# Altium PCB MD_Automated_Tester_V1.0.PcbDoc
Units mil, origin at the board's own origin, x right, y up, seen from the top; angles counter-clockwise.
Board outline 6000 x 4000 mil, 2 copper layers (Top Layer, Bottom Layer); 13 components, 14 nets, 68 pads, 0 vias.
Unrouted connection lines stored in the file: 12.
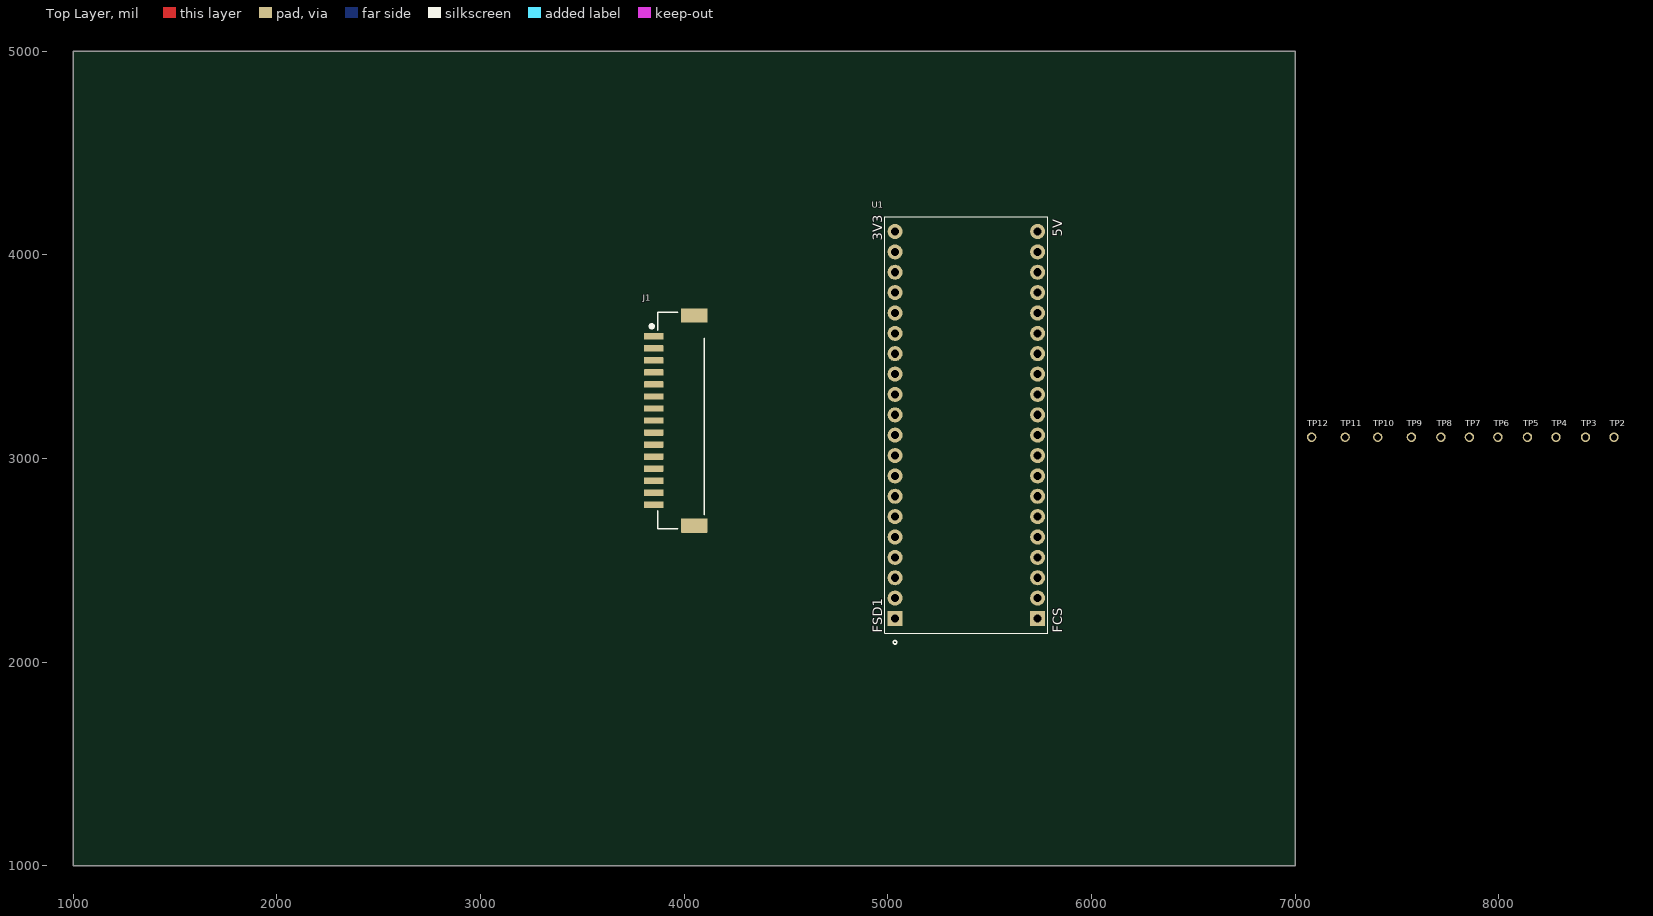
[diagram p0: Top Layer view]
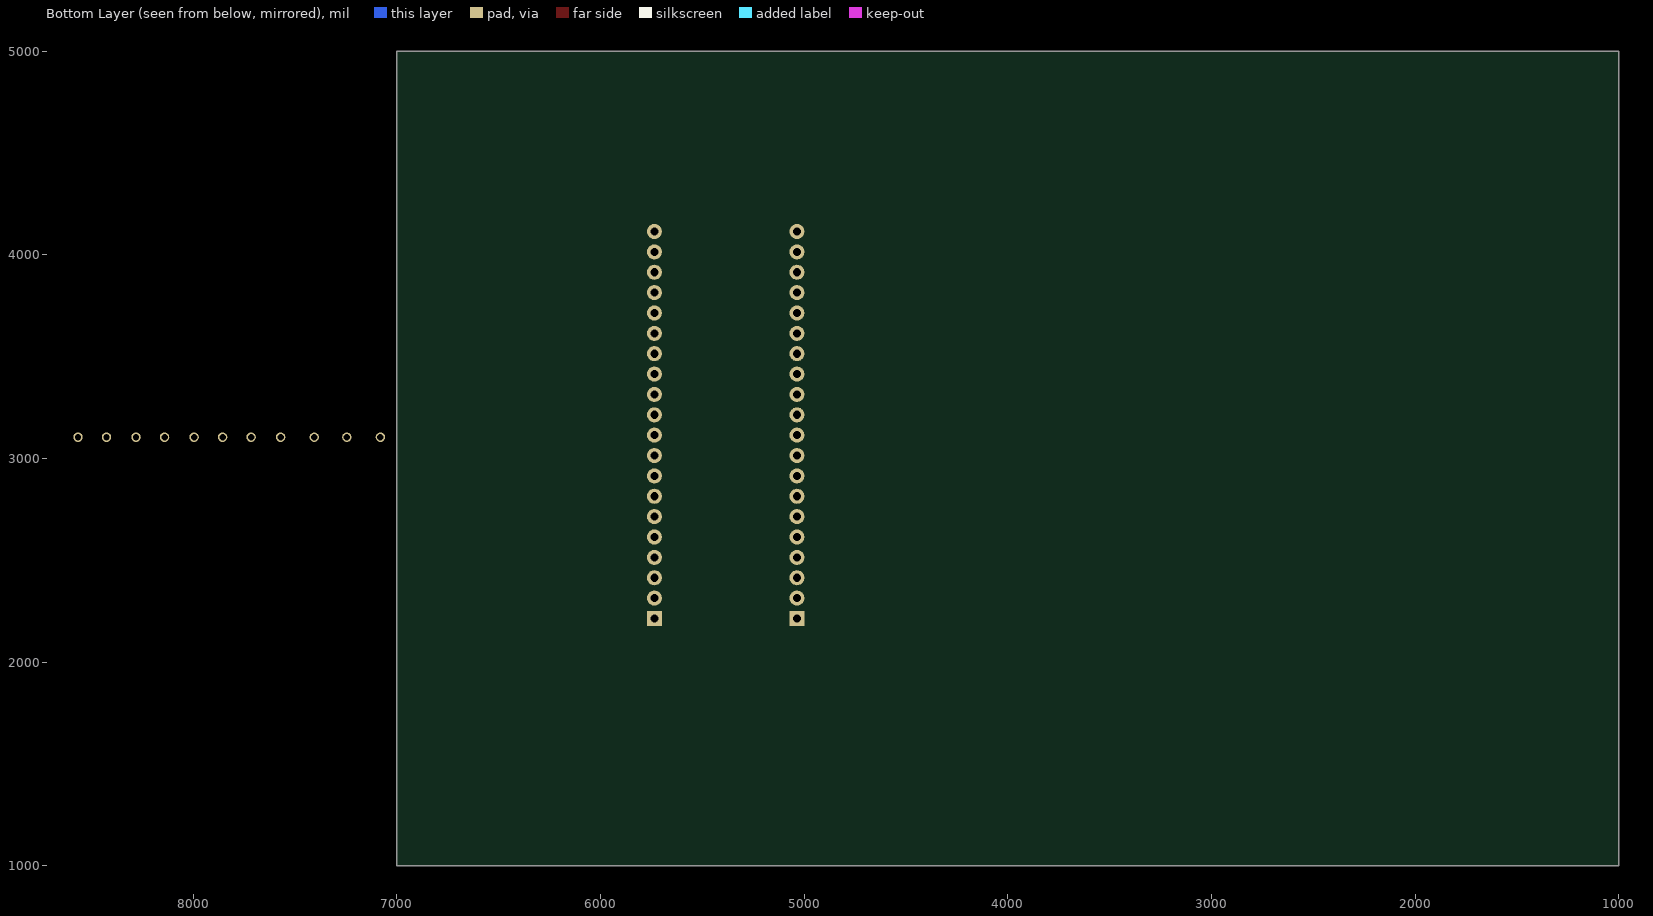
[diagram p1: Bottom Layer view, seen from below]

## Layer stack, top to bottom
Top Solder: solder mask 0.4, Solder Resist, Dk 3.5
Top Layer: signal copper 1.4
Dielectric 1: dielectric 12.6, FR-4, Dk 4.8
Bottom Layer: signal copper 1.4
Bottom Solder: solder mask 0.4, Solder Resist, Dk 3.5

## Board outline
1000,1000 7000,1000 7000,5000 1000,5000

## Design rules (kind name [scope] priority, off if disabled: settings)
Clearance [All] p1: gap=10 ignorepadtopadclearanceinfootprint=FALSE except(0: Arc-Hole Track-Hole SMDPad-Hole THPad-Hole Via-Hole Fill-Hole Poly-Hole Region-Hole Text-Hole)
PolygonConnect [All] p1: connectstyle=Relief reliefconductorwidth=10 reliefentries=4 polygonreliefangle="90 Angle" airgapwidth=10
RoomDefinition tester_sch [InComponentClass('tester_sch')] p1: confinementstyle=ConfineIn formatcopy=TRUE lockcomponents=FALSE outline 7045,1005 10025,1005 10025,3200 7045,3200
RoutingVias [All] p1: holewidth=28 width=50 viastyle="Through Hole" minholewidth=28 minwidth=50 maxholewidth=28 maxwidth=50
SolderMaskExpansion [All] p1: expansion=4 istentingtop=FALSE
Width [All] p1: maxlimit=10 minlimit=10 preferedwidth=10
30 further rules are at their usual default settings.

## Components (designator, comment, footprint, x,y, rotation, side; value= is the part's Value field where it differs from the comment)
J1 "BM15B-ZESS-TBT(LF)(SN)" "JST ZE SMT 15POS" 3958.27,3157.36 r90 top
TP2 "Test Point (Via)" TP 8565,3105 r0 top
TP3 "Test Point (Via)" TP 8425,3105 r0 top
TP4 "Test Point (Via)" TP 8280,3105 r0 top
TP5 "Test Point (Via)" TP 8140,3105 r0 top
TP6 "Test Point (Via)" TP 7995,3105 r0 top
TP7 "Test Point (Via)" TP 7855,3105 r0 top
TP8 "Test Point (Via)" TP 7715,3105 r0 top
TP9 "Test Point (Via)" TP 7570,3105 r0 top
TP10 "Test Point (Via)" TP 7405,3105 r90 top
TP11 "Test Point (Via)" TP 7245,3105 r0 top
TP12 "Test Point (Via)" TP 7080,3105 r90 top
U1 "ESP32-PICO-D4-KIT" ESP32-PICO-D4-KIT 5035,2215 r90 top

## Footprints (in the part's own frame and the unit in brackets; to place one, negate y for a bottom-side part, rotate by r counter-clockwise, add the part's x,y. Pads: shape width x height; smd on the part's side, far side on the other; paste and mask are expansions set on the pad)
ESP32-PICO-D4-KIT [mil]
  rect 74x74 hole 40: J2_1(0,0) J3_1(0,-700)
  round 74 hole 40: J2_2(100,0) J2_3(200,0) J2_4(300,0) J2_5(400,0) J2_6(500,0) J2_7(600,0) J2_8(700,0) J2_9(800,0) J2_10(900,0) J2_11(1000,0) J2_12(1100,0) J2_13(1200,0) J2_14(1300,0) J2_15(1400,0) J2_16(1500,0) J2_17(1600,0) J2_18(1700,0) J2_19(1800,0) J2_20(1900,0) J3_2(100,-700) J3_3(200,-700) J3_4(300,-700) J3_5(400,-700) J3_6(500,-700) J3_7(600,-700) J3_8(700,-700) J3_9(800,-700) J3_10(900,-700) J3_11(1000,-700) J3_12(1100,-700) J3_13(1200,-700) J3_14(1300,-700) J3_15(1400,-700) J3_16(1500,-700) J3_17(1600,-700) J3_18(1700,-700) J3_19(1800,-700) J3_20(1900,-700)
  silkscreen extent -126,-750 1974,50
"JST ZE SMT 15POS" [mm] "15 POS HDR JST ZE"
  rrect10% 1.8x3.3 smd: 0(-12.35,-2.3) 0(13.85,-2.3)
  rrect10% 0.8x2.4 smd: 1(11.25,2.75) 2(9.75,2.75) 3(8.25,2.75) 4(6.75,2.75) 5(5.25,2.75) 6(3.75,2.75) 7(2.25,2.75) 8(0.75,2.75) 9(-0.75,2.75) 10(-2.25,2.75) 11(-3.75,2.75) 12(-5.25,2.75) 13(-6.75,2.75) 14(-8.25,2.75) 15(-9.75,2.75)
  silkscreen extent -12.75,-3.55 14.26,3, body extent -12.75,-3.55 14.25,3.45, height 7.6
TP [mm] "Test point (40mil Standard)"
  round 1.181 hole 0.8: 1(0,0)

## Part data
J1: library part "CN 15POS JST ZE SMT", "CONN HEADER VERT SMD 15POS ZE", Supplier Part Number 1=455-4211-1-ND, Manufacturer Part Number 1=BM15B-ZESS-TBT(LF)(SN), Part Number="CN 15POS JST ZE SMT", Pin Count=15, Supplier 1=Digi-Key, Supplier URL 1=https://www.digikey.ca/en/products/detail/jst-sales-america-inc/BM15B-ZESS-TBT-LF-SN/1886999?s=N4IgTCBcDaIEIFkCMBWOBaAWgUQMq-QBU5CAKAGQDEBKU3AOWpAF0BfIA
U1: "- ESP32-PICO-D4 Transceiver; 802.11 b/g/n (Wi-Fi, WiFi, WLAN), Bluetooth® Smart Ready 4.x Dual Mode 2.4GHz Evaluation Board", Manufacturer Part Number 1=ESP32-PICO-KIT, Supplier Part Number 1="1904-1030-ND / 1904-1030-ND", Part Number=ESP32-PICO-D4-KIT, Supplier 1=Digi-Key, Supplier URL 1=https://www.digikey.ca/en/products/detail/espressif-systems/ESP32-PICO-KIT/9381703
TP2 TP3 TP4 TP5 TP6 TP7 TP8 TP9 TP10 TP11 TP12: Part Number="Test Point (Via)"

## Nets (pads, with @x,y where several pads share a name; then routed paths per layer and width w, separated by ;. In a path a pad name is that pad's centre, name@x,y a point inside that pad or via, vN(x,y) a via of type N, cw(c..) or ccw(c..) an arc to the next point about the centre after c; other vN are vias at no path point)
3V3: J1.14 J1.15
CS_CTRL_0: J1.2 TP2.1
CS_CTRL_1: J1.3 TP3.1
CS_CTRL_2: J1.4 TP4.1
CS_CTRL_3: J1.5 TP5.1
CS_CTRL_4: J1.6 TP6.1
CTRL_EN: J1.11 TP11.1
GND: J1.13
MISO: J1.9 TP9.1
MOSI: J1.10 TP10.1
MUX_SEL_0: J1.1
MUX_SEL_1: J1.7 TP7.1
RESET: J1.12 TP12.1
SCK: J1.8 TP8.1
pads on no net: J1.0 U1.J2_1 U1.J2_2 U1.J2_3 U1.J2_4 U1.J2_5 U1.J2_6 U1.J2_7 U1.J2_8 U1.J2_9 U1.J2_10 U1.J2_11 U1.J2_12 U1.J2_13 U1.J2_14 U1.J2_15 U1.J2_16 U1.J2_17 U1.J2_18 U1.J2_19 U1.J2_20 U1.J3_1 U1.J3_2 U1.J3_3 U1.J3_4 U1.J3_5 U1.J3_6 U1.J3_7 U1.J3_8 U1.J3_9 U1.J3_10 U1.J3_11 U1.J3_12 U1.J3_13 U1.J3_14 U1.J3_15 U1.J3_16 U1.J3_17 U1.J3_18 U1.J3_19 U1.J3_20

## Text inside footprints (layer, text, board x,y; h text height)
U1: Top Overlay "5V" at 5855.23,4090.45 h47.27 r90; Top Overlay "3V3" at 4971.38,4070.52 h47.27 r90; Top Overlay "FCS" at 5855.59,2143.72 h47.3 r90; Top Overlay "FSD1" at 4971.4,2144.47 h47.27 r90